# Altium PCB BatteryIot -V2.PcbDoc (part 2 of 2)
Units mm, origin at the board's own origin, x right, y up, seen from the top; angles counter-clockwise.
Board outline 114 x 84 mm, 2 copper layers (Top Layer, Bottom Layer); 153 components, 93 nets, 528 pads, 132 vias.
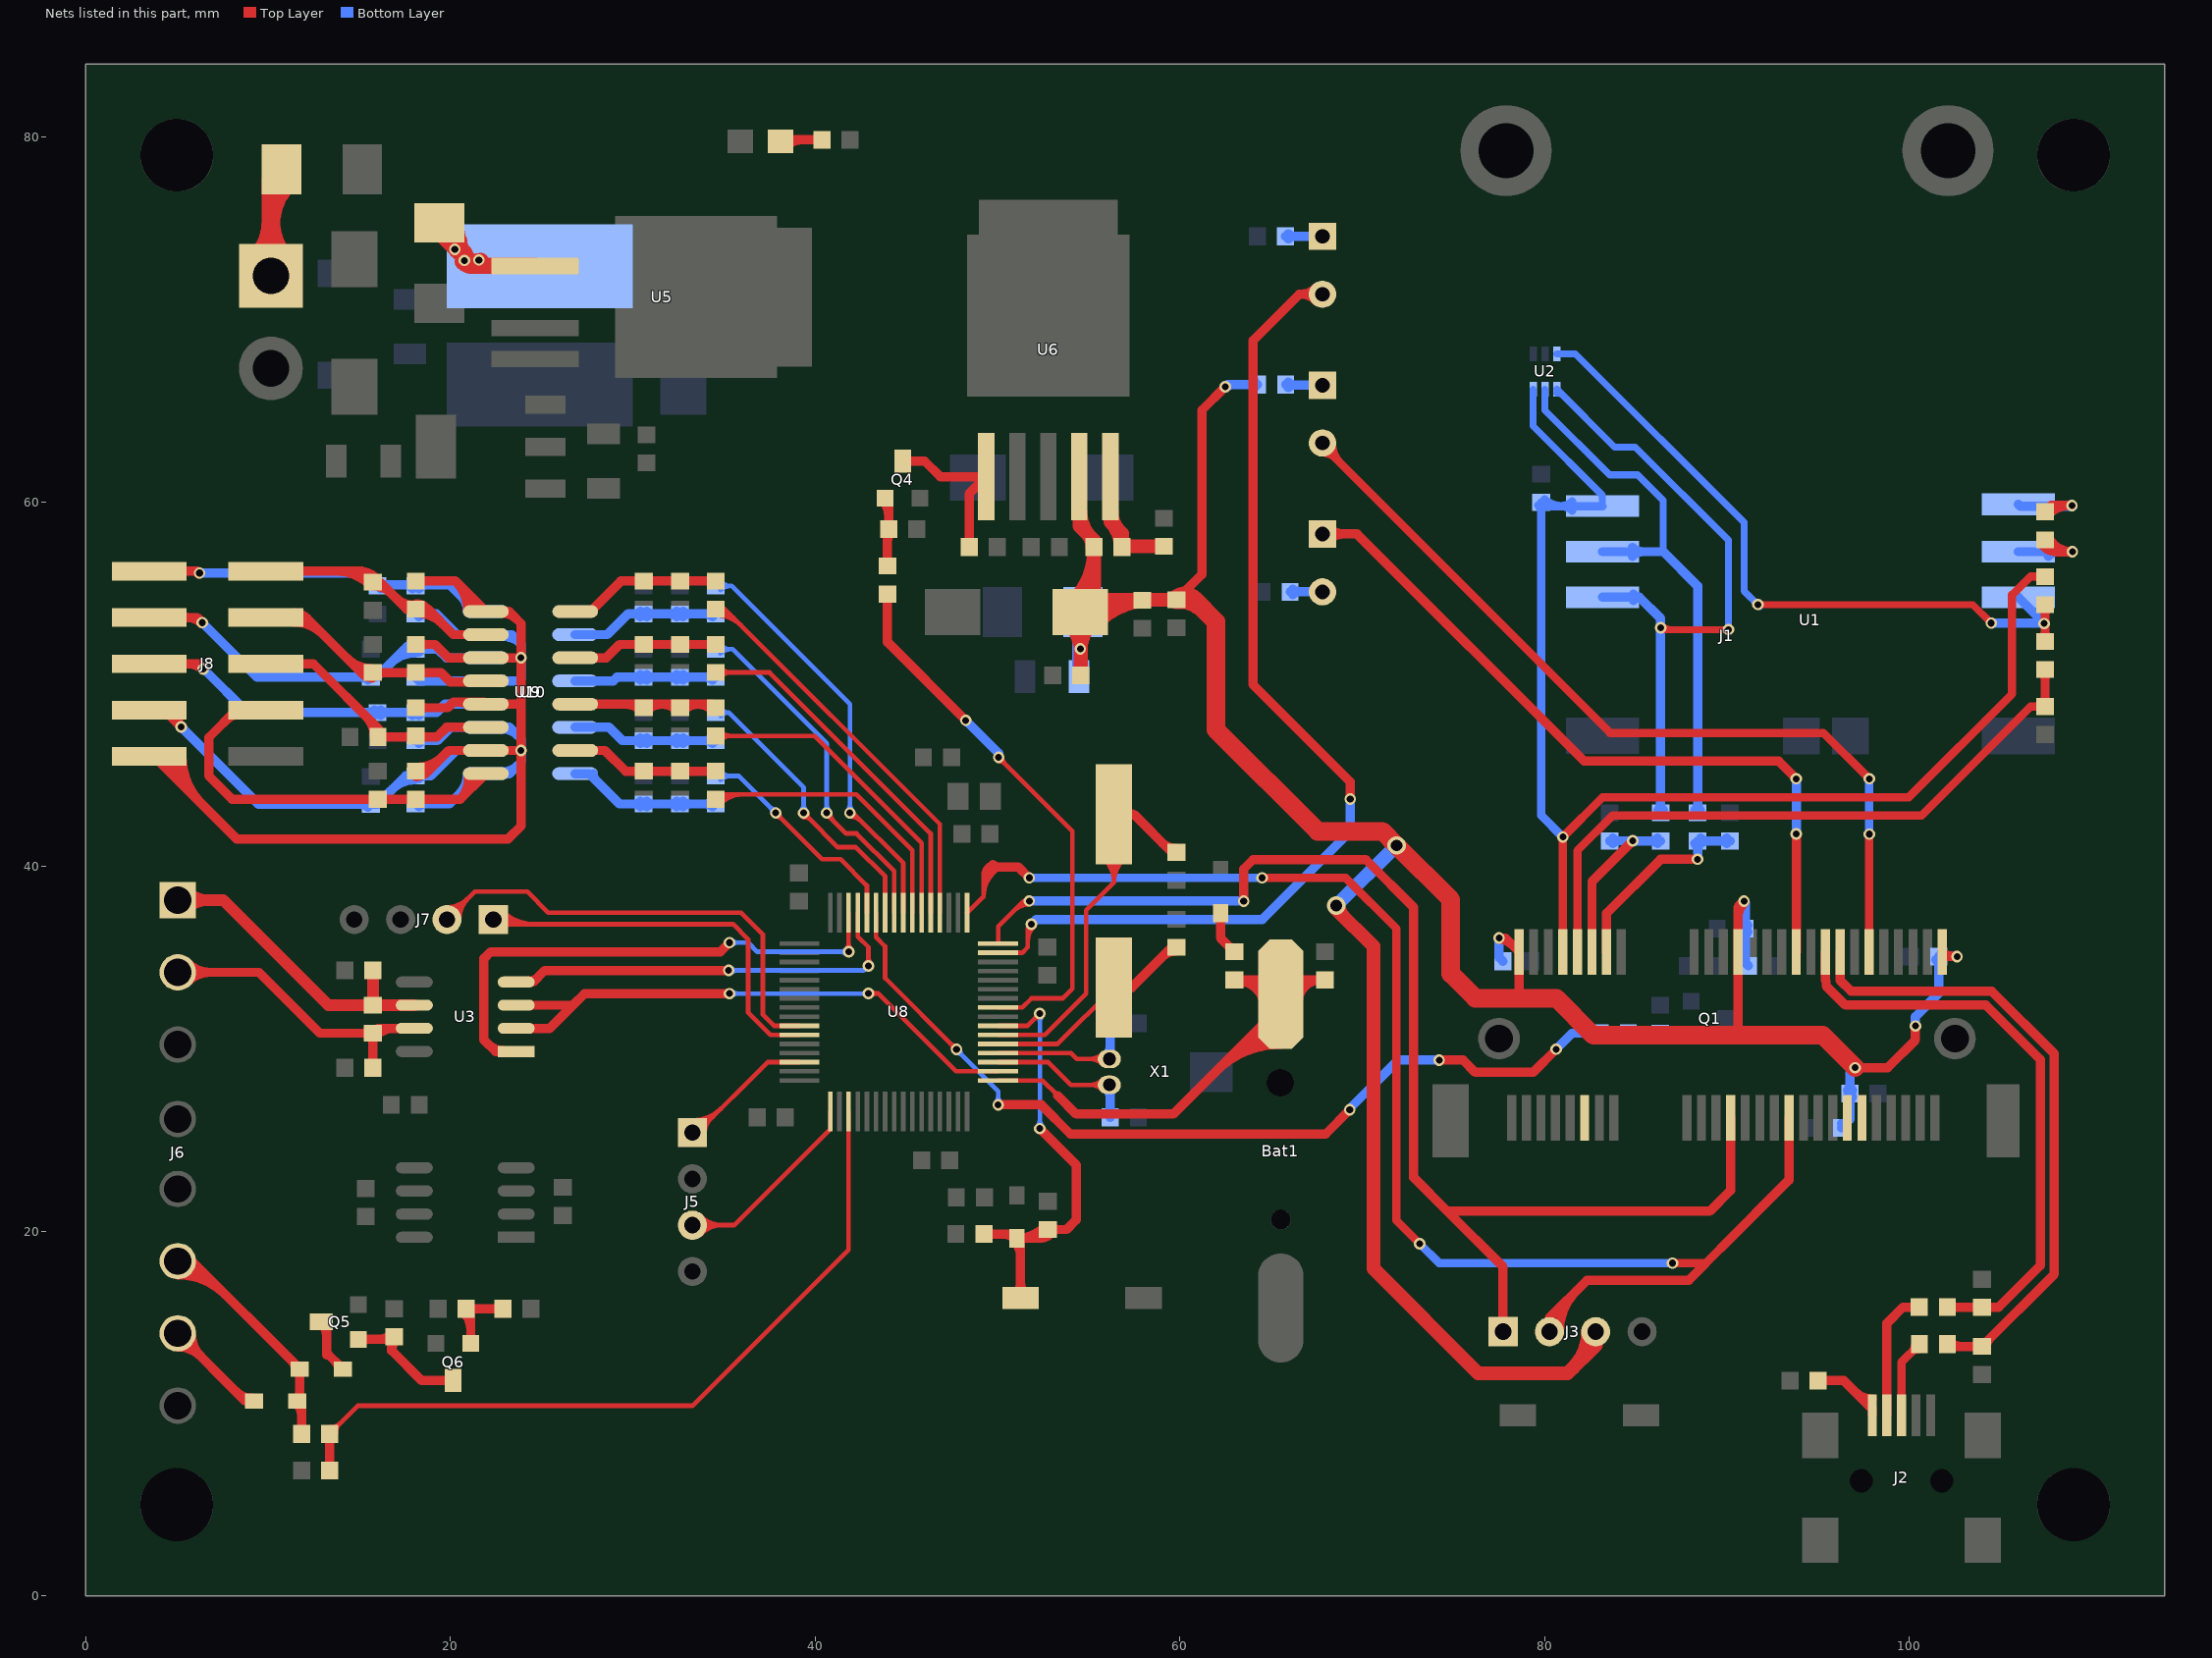
[diagram p2: the nets of this part, all layers, seen from the top]

## Via types
v1: diameter 0.635, hole 0.381, Top Layer to Bottom Layer, 96 vias
v2: diameter 1.016, hole 0.635, Top Layer to Bottom Layer, 31 vias
v3: diameter 0.889, hole 0.508, Top Layer to Bottom Layer, 5 vias

## Nets (pads, with @x,y where several pads share a name; then routed paths per layer and width w, separated by ;. In a path a pad name is that pad's centre, name@x,y a point inside that pad or via, vN(x,y) a via of type N, cw(c..) or ccw(c..) an arc to the next point about the centre after c; other vN are vias at no path point) (continued)
GND_OUT: C42.1 C44.1 C46.1 C48.1 C50.1 C52.1 C54.1 C56.1 J8.10 U9.9 U9.11 U9.13 U9.15 U10.9 U10.11 U10.13 U10.15 | length 110.7
  Top Layer w0.508: J8.10@3.493,46.025 3.759,46.025 8.28,41.504 23.165,41.504 23.876,42.215 v1(23.876,46.355) ; J8.10@3.765,46.025 ccw(c3.777,46.025) J8.10@3.768,46.016 ; J8.10@4.273,46.025 ccw(c5.512,46.025) 4.635,45.149 ; J8.10@4.781,46.025 ccw(c7.246,46.025) 5.503,44.281 ; J8.10@5.289,46.025 ccw(c8.981,46.025) 6.37,43.414 ; C42.1@18.108,45.22 18.779,45.22 19.914,46.355 U9.15@21.948,46.355 v1(23.876,46.355) ; C44.1@18.108,48.694 19.85,48.694 20.153,48.997 21.846,48.997 U9.13@21.948,48.895 23.876,48.895 ; C46.1@18.108,52.168 19.155,52.168 19.888,51.435 U9.11@21.948,51.435 v1(23.876,51.435) ; C48.1@18.108,55.642 20.281,55.642 ; C42.1@18.133,44.923 ccw(c18.133,45.765) 18.728,45.17 ; C42.1@18.133,45.431 ccw(c18.133,47.5) 19.595,46.037 ; C42.1@18.282,45.071 cw(c18.642,44.711) 18.642,45.22 cw(c18.642,45.729) C42.1@18.282,45.369 ; C44.1@18.282,48.545 cw(c18.642,48.185) 18.642,48.694 cw(c18.642,49.203) C44.1@18.282,48.843 ; C46.1@18.282,52.019 cw(c18.642,51.659) 18.642,52.168 cw(c18.642,52.677) C46.1@18.282,52.317 ; C48.1@18.282,55.493 cw(c18.642,55.133) 18.642,55.642 cw(c18.642,56.151) C48.1@18.282,55.791 ; 20.571,48.997 cw(c20.571,48.418) U9.13@20.98,48.827 ; U9.9@20.952,53.977 ccw(c18.66,54.021) 20.281,55.642 ; 21.125,54.798 cw(c20.316,53.989) U9.9@21.46,53.967 ; U9.9@22.848,53.879 cw(c22.848,52.759) 23.64,53.551 ; 20.281,55.642 U9.9@21.948,53.975 23.216,53.975 23.876,53.315 v1(23.876,51.435) ; v1(23.876,46.355) 23.927,46.355 23.876,46.406 23.876,48.895 ; 23.876,48.895 v1(23.876,51.435)
  Bottom Layer w0.508: C56.1@18.094,43.418 19.948,43.418 21.615,45.085 U10.9@21.934,45.085 23.241,45.085 23.876,45.72 v1(23.876,46.355) 23.876,46.99 23.241,47.625 U10.11@21.934,47.625 20.015,47.625 19.282,46.892 C54.1@18.094,46.892 ; C52.1@18.094,50.366 18.295,50.165 U10.13@21.934,50.165 23.749,50.165 23.876,50.292 v1(23.876,51.435) 23.876,52.197 23.368,52.705 U10.15@21.934,52.705 20.371,52.705 19.236,53.84 C50.1@18.094,53.84 ; C56.1@18.268,43.269 cw(c18.628,42.909) 18.628,43.418 cw(c18.628,43.927) C56.1@18.268,43.567 ; C54.1@18.268,46.743 cw(c18.628,46.383) 18.628,46.892 cw(c18.628,47.401) C54.1@18.268,47.041 ; C52.1@18.268,50.515 ccw(c19.114,51.361) 19.114,50.165 ; C50.1@18.268,53.691 cw(c18.628,53.331) 18.628,53.84 cw(c18.628,54.349) C50.1@18.268,53.989 ; 20.459,43.929 ccw(c19.303,45.085) U10.9@20.938,45.085 ; U10.9@21.326,44.796 ccw(c21.037,45.085) U10.9@21.446,45.085 ; U10.9@22.834,45.181 ccw(c22.834,46.395) 23.693,45.537 ; U10.11@22.834,47.529 cw(c22.834,46.315) 23.693,47.173 ; U10.15@22.837,52.609 cw(c22.88,51.201) 23.876,52.197
LED_WWAN: J1.42 LED1.2 | length 49.2
  Top Layer w0.457: LED1.2@67.818,62.693 cw(c67.818,61.725) 68.502,62.409 ; LED1.2@67.818,63.214 67.818,63.094 83.591,47.32 95.283,47.32 v1(97.8,44.803) ; LED1.2@68.339,63.214 ccw(c69.889,63.214) 68.793,62.118 ; J1.42@97.8,35.302 v1(97.8,41.765)
  Bottom Layer w0.457: v1(97.8,41.765) v1(97.8,44.803)
NetC41_1: C41.1 R40.1 R41.2 U9.2 | length 12.2
  Top Layer w0.508: U9.2@26.848,46.355 28.473,46.355 29.608,45.22 R41.2@34.558,45.22 ; C41.1@30.433,45.071 ccw(c30.073,44.711) 30.073,45.22 ccw(c30.073,45.729) C41.1@30.433,45.369 ; C41.1@30.781,45.071 cw(c31.142,44.711) 31.142,45.22 cw(c31.142,45.729) C41.1@30.781,45.369 ; R40.1@32.43,45.071 ccw(c32.069,44.711) 32.069,45.22 ccw(c32.069,45.729) R40.1@32.43,45.369 ; R40.1@32.778,45.071 cw(c33.138,44.711) 33.138,45.22 cw(c33.138,45.729) R40.1@32.778,45.369 ; R41.2@34.384,45.071 ccw(c34.023,44.711) 34.023,45.22 ccw(c34.023,45.729) R41.2@34.384,45.369
NetC43_1: C43.1 R43.1 R44.2 U9.4 | length 12.5
  Top Layer w0.508: U9.4@26.848,48.895 34.357,48.895 R44.2@34.558,48.694 ; 29.588,48.895 cw(c29.588,47.699) C43.1@30.433,48.545 ; C43.1@30.781,48.545 cw(c31.627,47.699) 31.627,48.895 ; 31.584,48.895 cw(c31.584,47.699) R43.1@32.43,48.545 ; R43.1@32.778,48.545 cw(c33.623,47.699) 33.623,48.895 ; 33.538,48.895 cw(c33.538,47.699) R44.2@34.384,48.545
NetC45_1: C45.1 R46.1 R47.2 U9.6 | length 12
  Top Layer w0.508: U9.6@26.848,51.435 28.55,51.435 29.283,52.168 R47.2@34.558,52.168 ; C45.1@30.433,52.019 ccw(c30.073,51.659) 30.073,52.168 ccw(c30.073,52.677) C45.1@30.433,52.317 ; C45.1@30.781,52.019 cw(c31.142,51.659) 31.142,52.168 cw(c31.142,52.677) C45.1@30.781,52.317 ; R46.1@32.43,52.019 ccw(c32.069,51.659) 32.069,52.168 ccw(c32.069,52.677) R46.1@32.43,52.317 ; R46.1@32.778,52.019 cw(c33.138,51.659) 33.138,52.168 cw(c33.138,52.677) R46.1@32.778,52.317 ; R47.2@34.384,52.019 ccw(c34.023,51.659) 34.023,52.168 ccw(c34.023,52.677) R47.2@34.384,52.317
NetC47_1: C47.1 R49.1 R50.2 U9.8 | length 12.4
  Top Layer w0.508: U9.8@26.848,53.975 27.686,53.975 29.353,55.642 R50.2@34.558,55.642 ; C47.1@30.433,55.493 ccw(c30.073,55.133) 30.073,55.642 ccw(c30.073,56.151) C47.1@30.433,55.791 ; C47.1@30.781,55.493 cw(c31.142,55.133) 31.142,55.642 cw(c31.142,56.151) C47.1@30.781,55.791 ; R49.1@32.43,55.493 ccw(c32.069,55.133) 32.069,55.642 ccw(c32.069,56.151) R49.1@32.43,55.791 ; R49.1@32.778,55.493 cw(c33.138,55.133) 33.138,55.642 cw(c33.138,56.151) R49.1@32.778,55.791 ; R50.2@34.384,55.493 ccw(c34.023,55.133) 34.023,55.642 ccw(c34.023,56.151) R50.2@34.384,55.791
NetC49_1: C49.1 R52.1 R53.2 U10.2 | length 12.2
  Bottom Layer w0.508: U10.2@26.834,52.705 28.6,52.705 29.735,53.84 R53.2@34.544,53.84 ; C49.1@30.419,53.691 ccw(c30.059,53.331) 30.059,53.84 ccw(c30.059,54.349) C49.1@30.419,53.989 ; C49.1@30.768,53.691 cw(c31.128,53.331) 31.128,53.84 cw(c31.128,54.349) C49.1@30.768,53.989 ; R52.1@32.416,53.691 ccw(c32.056,53.331) 32.056,53.84 ccw(c32.056,54.349) R52.1@32.416,53.989 ; R52.1@32.764,53.691 cw(c33.124,53.331) 33.124,53.84 cw(c33.124,54.349) R52.1@32.764,53.989 ; R53.2@34.37,53.691 ccw(c34.01,53.331) 34.01,53.84 ccw(c34.01,54.349) R53.2@34.37,53.989
NetC51_1: C51.1 R55.1 R56.2 U10.4 | length 11.8
  Bottom Layer w0.508: U10.4@26.834,50.165 28.933,50.165 29.134,50.366 R56.2@34.544,50.366 ; C51.1@30.419,50.217 ccw(c30.059,49.857) 30.059,50.366 ccw(c30.059,50.875) C51.1@30.419,50.515 ; C51.1@30.768,50.217 cw(c31.128,49.857) 31.128,50.366 cw(c31.128,50.875) C51.1@30.768,50.515 ; R55.1@32.416,50.217 ccw(c32.056,49.857) 32.056,50.366 ccw(c32.056,50.875) R55.1@32.416,50.515 ; R55.1@32.764,50.217 cw(c33.124,49.857) 33.124,50.366 cw(c33.124,50.875) R55.1@32.764,50.515 ; R56.2@34.37,50.217 ccw(c34.01,49.857) 34.01,50.366 ccw(c34.01,50.875) R56.2@34.37,50.515
NetC53_1: C53.1 R58.1 R59.2 U10.6 | length 12
  Bottom Layer w0.508: U10.6@26.834,47.625 28.702,47.625 29.435,46.892 R59.2@34.544,46.892 ; C53.1@30.419,46.743 ccw(c30.059,46.383) 30.059,46.892 ccw(c30.059,47.401) C53.1@30.419,47.041 ; C53.1@30.768,46.743 cw(c31.128,46.383) 31.128,46.892 cw(c31.128,47.401) C53.1@30.768,47.041 ; R58.1@32.416,46.743 ccw(c32.056,46.383) 32.056,46.892 ccw(c32.056,47.401) R58.1@32.416,47.041 ; R58.1@32.764,46.743 cw(c33.124,46.383) 33.124,46.892 cw(c33.124,47.401) R58.1@32.764,47.041 ; R59.2@34.37,46.743 ccw(c34.01,46.383) 34.01,46.892 ccw(c34.01,47.401) R59.2@34.37,47.041
NetC55_1: C55.1 R61.1 R62.2 U10.8 | length 12.8
  Bottom Layer w0.508: U10.8@26.834,45.085 27.61,45.085 29.277,43.418 R62.2@34.544,43.418 ; U10.8@27.83,45.085 ccw(c28.362,45.085) 27.986,44.709 ; C55.1@30.419,43.269 ccw(c30.059,42.909) 30.059,43.418 ccw(c30.059,43.927) C55.1@30.419,43.567 ; C55.1@30.768,43.269 cw(c31.128,42.909) 31.128,43.418 cw(c31.128,43.927) C55.1@30.768,43.567 ; R61.1@32.416,43.269 ccw(c32.056,42.909) 32.056,43.418 ccw(c32.056,43.927) R61.1@32.416,43.567 ; R61.1@32.764,43.269 cw(c33.124,42.909) 33.124,43.418 cw(c33.124,43.927) R61.1@32.764,43.567 ; R62.2@34.37,43.269 ccw(c34.01,42.909) 34.01,43.418 ccw(c34.01,43.927) R62.2@34.37,43.567
NetD1_1: D1.1 J4.1 | length 13.4
  Top Layer w1.016: J4.1@9.282,73.268 ccw(c7.162,75.388) 10.16,75.388 ccw(c13.158,75.388) J4.1@11.038,73.268 ; J4.1@10.16,72.39 10.16,77.648 D1.1@10.744,78.232 ; 10.16,75.15 cw(c13.534,75.15) D1.1@11.148,77.536
NetD2_2: D2.2 L1.1 U5.2 | length 13
  Top Layer w0.889: D2.2@19.558,74.6 21.235,72.923 ; v1@20.271,73.962 cw(c20.086,73.12) 20.812,73.584 ; D2.2@20.332,75.256 ccw(c23.422,75.111) 21.235,72.923 ; v1@20.346,73.763 ccw(c19.76,74.193) D2.2@20.478,74.303 ; v1@20.654,73.504 ccw(c21.565,74.414) v1@21.565,73.127 ; v1@21.475,73.164 ccw(c22.055,73.744) 22.055,72.923 ; v1@21.678,73.196 cw(c21.235,73.42) 21.235,72.923 ; U5.2@24.638,72.923 21.235,72.923 ; v1@20.687,73.138 ccw(c21.206,73.657) 21.206,72.923 cw(c21.206,73.657) v1@20.687,73.138
  other v1: 20.777,73.228 21.565,73.254 20.244,73.838
NetD7_2: D7.2 R34.1 | length 3.2
  Top Layer w0.508: D7.2@62.23,37.428 62.23,36.076 R34.1@62.992,35.314 ; R34.1@62.589,35.717 cw(c62.186,35.314) R34.1@62.756,35.314 ; R34.1@62.649,35.657 ccw(c62.967,35.974) R34.1@62.967,35.525
NetD9_1: D9.1 Q5.3 | length 4.3
  Top Layer w0.508: Q5.3@12.925,15.021 13.208,14.738 13.208,13.208 13.329,13.208 D9.1@14.105,12.432 ; Q5.3@12.959,14.878 cw(c12.359,14.277) 13.208,14.277 ; 13.685,12.852 cw(c13.265,12.432) D9.1@13.859,12.432
NetD9_2: D9.2 D10.2 J6.6 R37.1 | length 20
  Top Layer w0.508: J6.6@5.055,17.6 cw(c5.055,13.924) 7.654,16.523 ; J6.6@5.055,18.108 cw(c5.055,15.659) 6.787,17.391 ; J6.6@5.055,18.346 5.831,18.346 D9.2@11.745,12.432 ; 11.325,12.852 cw(c10.905,12.432) D9.2@11.499,12.432 ; D10.2@11.565,10.554 cw(c10.904,9.893) 11.839,9.893 ; D10.2@11.565,10.782 ccw(c11.131,11.216) 11.745,11.216 ; R37.1@11.69,9.05 ccw(c11.33,9.41) 11.839,9.41 ccw(c12.349,9.41) R37.1@11.988,9.05 ; D9.2@11.715,12.401 11.745,12.371 11.745,10.654 11.839,10.56 R37.1@11.839,8.876
NetD10_1: D10.1 J6.7 | length 9.6
  Top Layer w0.508: J6.7@5.055,13.64 cw(c5.055,11.839) 6.328,13.112 cw(c7.602,14.386) J6.7@5.801,14.386 ; J6.7@5.055,14.386 8.773,10.668 D10.1@9.234,10.668 ; 8.232,11.209 ccw(c9.149,12.126) D10.1@9.149,10.829
NetJ1_32: J1.32 LED4.1 | length 42.9
  Top Layer w0.508: LED4.1@67.818,58.23 69.71,58.23 82.169,45.771 92.833,45.771 v1(93.8,44.803) ; LED4.1@68.169,57.879 cw(c69.015,57.032) 69.015,58.23 cw(c69.015,59.427) LED4.1@68.169,58.58 ; J1.32@93.8,35.302 v1(93.8,41.781)
  Bottom Layer w0.508: v1(93.8,41.781) v1(93.8,44.803)
NetJ2_2: J2.2 R16.1 | length 8
  Top Layer w0.508: J2.2@98.768,9.899 98.768,14.942 99.65,15.824 R16.1@100.541,15.824 ; R16.1@100.392,15.675 ccw(c100.032,15.315) 100.032,15.824 ccw(c100.032,16.333) R16.1@100.392,15.973
NetJ2_3: J2.3 R14.1 | length 5.2
  Top Layer w0.457: J2.3@99.568,9.899 99.568,12.811 R14.1@100.549,13.792 ; R14.1@100.103,13.346 cw(c100.549,12.9) R14.1@100.549,13.531 ; R14.1@100.163,13.406 ccw(c99.802,13.767) R14.1@100.313,13.767
NetLED1_1: LED1.1 R17.2 | length 2.8
  Bottom Layer w0.508: R17.2@65.802,66.421 65.834,66.389 LED1.1@67.818,66.389 ; R17.2@65.951,66.247 cw(c66.295,65.903) 66.295,66.389 ; R17.2@65.951,66.545 ccw(c66.328,66.922) 66.328,66.389
NetLED2_1: LED2.1 R22.1 | length 4.6
  Top Layer w0.508: LED2.1@38.099,79.758 38.187,79.846 R22.1@40.378,79.846 ; LED2.1@38.434,79.488 cw(c39.296,78.626) 39.296,79.846 ; LED2.1@38.434,80.027 ccw(c38.872,80.465) 38.872,79.846 ; R22.1@40.229,79.696 ccw(c39.869,79.336) 39.869,79.846 ccw(c39.869,80.355) R22.1@40.229,79.995
NetLED3_1: LED3.1 R32.2 | length 2.8
  Bottom Layer w0.508: R32.2@65.794,74.549 LED3.1@67.818,74.549 ; R32.2@65.943,74.4 cw(c66.303,74.04) 66.303,74.549 cw(c66.303,75.058) R32.2@65.943,74.698
NetLED4_2: LED4.2 R13.2 | length 2.6
  Bottom Layer w0.508: R13.2@66.048,55.054 LED4.2@67.818,55.054 ; R13.2@66.197,54.905 cw(c66.557,54.545) 66.557,55.054 cw(c66.557,55.564) R13.2@66.197,55.204
NetQ1_1: Q1.1 R4.2 R5.1 | length 4.3
  Bottom Layer w0.508: R4.2@84.59,30.849 84.744,30.695 Q1.1@88.048,30.695 ; Q1.1@87.904,30.551 ccw(c87.557,30.204) 87.557,30.695 ccw(c87.557,31.185) Q1.1@87.904,30.838
NetQ4_1: Q4.1 R27.1 R28.2 | length 6.9
  Top Layer w0.508: Q4.1@43.694,60.05 cw(c42.876,59.232) 44.033,59.232 ; R27.1@43.818,56.621 ccw(c43.458,56.982) 43.967,56.982 ccw(c44.477,56.982) R27.1@44.117,56.621 ; Q4.1@43.838,60.193 cw(c43.838,59.998) 44.033,59.998 R28.2@44.033,58.485 43.967,58.42 R27.1@43.967,56.472 ; R28.2@43.884,58.66 ccw(c43.523,59.02) 44.033,59.02 ccw(c44.542,59.02) R28.2@44.182,58.66 ; 43.967,57.793 cw(c44.7,57.793) R28.2@44.182,58.311
NetQ4_3: Q4.3 R23.1 U6.1 | length 12.2
  Top Layer w0.508: Q4.3@44.803,62.225 46.004,62.225 46.862,61.367 U6.1@49.384,61.367 48.447,60.43 R23.1@48.447,57.506 ; Q4.3@44.947,62.082 cw(c45.293,61.735) 45.293,62.225 cw(c45.293,62.716) Q4.3@44.947,62.369 ; R23.1@48.298,57.68 ccw(c47.938,58.04) 48.447,58.04 ccw(c48.957,58.04) R23.1@48.596,57.68 ; U6.1@49.188,61.367 cw(c48.715,61.367) 49.05,61.033 cw(c49.384,60.698) U6.1@49.384,61.171 ; U6.1@49.246,61.229 ccw(c48.911,60.894) 48.911,61.367 ccw(c48.911,61.841) U6.1@49.246,61.506
NetQ5_1: Q5.1 Q6.3 R29.2 | length 9.5
  Top Layer w0.508: Q5.1@14.957,14.056 16.781,14.056 16.781,13.445 18.429,11.797 Q6.3@20.153,11.797 ; Q5.1@15.101,13.912 cw(c15.448,13.565) 15.448,14.056 cw(c15.448,14.547) Q5.1@15.101,14.2 ; 16.04,14.056 ccw(c16.04,15.064) R29.2@16.753,14.351 ; 16.781,13.435 cw(c17.621,13.435) R29.2@17.047,14.048 ; Q6.3@20.009,11.653 ccw(c19.662,11.306) 19.662,11.797 ccw(c19.662,12.288) Q6.3@20.009,11.941
NetQ6_1: Q6.1 R30.1 R31.2 | length 7.5
  Top Layer w0.508: R31.2@20.715,15.56 cw(c19.742,14.586) 21.118,14.586 ; Q6.1@20.974,13.973 ccw(c20.628,14.32) 21.118,14.32 ccw(c21.609,14.32) Q6.1@21.262,13.973 ; R31.2@21.013,15.585 cw(c21.374,15.225) 21.374,15.734 cw(c21.374,16.243) R31.2@21.013,15.883 ; Q6.1@21.118,13.829 21.118,15.48 R31.2@20.864,15.734 R30.1@22.88,15.734 ; R30.1@22.731,15.585 ccw(c22.371,15.225) 22.371,15.734 ccw(c22.371,16.243) R30.1@22.731,15.883
NetR2_2: R2.2 R3.1 U1.6 U2.3 | length 41.1
  Top Layer w0.381: v1(91.694,54.356) 103.476,54.356 v1(104.492,53.34) v1@104.517,53.315
  Top Layer w0.508: R3.1@107.293,52.481 ccw(c106.933,52.841) 107.442,52.841 ccw(c107.951,52.841) R3.1@107.591,52.481 ; R2.2@107.293,54.199 cw(c106.933,53.839) 107.442,53.839 cw(c107.951,53.839) R2.2@107.591,54.199 ; R3.1@107.442,52.332 R2.2@107.442,54.348
  Bottom Layer w0.381: U2.3@80.672,68.106 81.69,68.106 90.932,58.864 90.932,55.11 v1@91.8,54.242 ; 91.464,54.578 ccw(c91.694,54.809) v1@91.694,54.483
  Bottom Layer w0.508: v1(104.492,53.34) 107.366,53.34 v1(107.391,53.315) 107.391,53.337 U1.6@105.974,54.754
NetR6_1: R6.1 U1.2 U2.5 | length 33.1
  Bottom Layer w0.381: U2.5@80.022,66.166 80.022,65.012 83.566,61.468 85.11,61.468 86.51,60.068 86.51,57.254
  Bottom Layer w0.508: U1.2@83.174,57.254 86.51,57.254 88.392,55.372 R6.1@88.392,42.934 ; U1.2@84.819,57.009 cw(c85.409,56.419) 85.409,57.254 cw(c85.409,58.089) U1.2@84.819,57.499 ; R6.1@88.243,43.083 ccw(c87.883,43.443) 88.392,43.443 ccw(c88.901,43.443) R6.1@88.541,43.083
NetR7_1: R7.1 U1.3 U2.4 | length 38.3
  Top Layer w0.381: v1(86.36,53.086) 86.462,52.984 v1(90.08,52.984) ; v1@86.45,53.176 ccw(c86.912,53.638) 86.912,52.984
  Bottom Layer w0.381: U2.4@80.672,65.957 cw(c80.672,65.451) 81.029,65.808 ; U2.4@80.672,66.166 83.846,62.992 84.974,62.992 90.08,57.886 v1(90.08,52.984)
  Bottom Layer w0.508: U1.3@83.174,54.754 85.2,54.754 ; U1.3@84.867,54.57 cw(c85.2,54.361) 85.2,54.754 ; U1.3@84.867,54.938 ccw(c85.2,55.147) 85.2,54.754 ; R7.1@86.211,43.083 ccw(c85.851,43.443) 86.36,43.443 ccw(c86.869,43.443) R7.1@86.509,43.083 ; R7.1@86.36,42.934 v1(86.36,53.086) 86.36,53.594 85.2,54.754
NetR8_1: R8.1 U1.5 | length 9.5
  Top Layer w0.508: R8.1@107.208,57.759 ccw(c108.074,58.244) 108.074,57.252 ; R8.1@107.442,57.904 108.094,57.252 v1(108.941,57.252) cw(c108.941,58.73) R8.1@107.651,58.007 ; R8.1@107.467,57.693 cw(c107.467,57.244) R8.1@107.785,57.561 ; R8.1@107.678,57.904 ccw(c108.248,57.904) R8.1@107.845,57.501
  Bottom Layer w0.508: U1.5@105.974,57.254 v1@108.966,57.254 ; U1.5@107.619,57.009 cw(c108.209,56.419) 108.209,57.254 cw(c108.209,58.089) U1.5@107.619,57.499
NetR8_2: R8.2 U1.4 | length 6
  Top Layer w0.508: R8.2@107.442,59.444 107.79,59.792 v1(108.915,59.792) ; R8.2@107.616,59.295 cw(c108.816,58.095) v1@108.816,59.792
  Bottom Layer w0.508: U1.4@105.974,59.854 106.074,59.754 v1@108.966,59.754
NetR24_1: R24.1 R26.2 U6.5 | length 9.1
  Top Layer w0.762: U6.5@56.191,61.367 56.191,58.896 ; U6.5@56.26,59.417 ccw(c57.686,59.417) 56.678,58.41 ; R24.1@56.744,57.532 ccw(c54.857,57.562) 56.191,58.896 ; R26.2@59.131,57.548 56.871,57.548 R24.1@56.828,57.506 56.828,58.26 56.191,58.896
NRST: Bt1.2 C33.1 D8.1 R35.2 U8.7 | length 33.6
  Top Layer w0.254: U8.7@50.038,31.258 51.654,31.258 v1(52.324,31.928) v1@52.407,32.011 ; v1@52.134,31.928 cw(c51.674,31.928) 51.999,31.603 cw(c52.324,31.278) v1@52.324,31.738
  Top Layer w0.508: C33.1@49.259,19.837 50.814,19.837 D8.1@51.054,19.597 ; C33.1@49.408,19.688 cw(c49.768,19.328) 49.768,19.837 cw(c49.768,20.347) C33.1@49.408,19.987 ; 50.291,19.837 cw(c50.291,18.919) D8.1@50.94,19.568 ; D8.1@50.94,19.398 cw(c50.167,18.625) 51.26,18.625 ; Bt1.2@51.016,16.577 ccw(c50.425,17.168) 51.26,17.168 ccw(c52.096,17.168) Bt1.2@51.505,16.577 ; Bt1.2@51.26,16.332 51.26,19.391 D8.1@51.054,19.597 ; 52.276,19.597 ccw(c52.276,20.536) R35.2@52.941,19.874 ; v1(52.324,25.619) 54.312,23.631 54.312,20.606 53.789,20.083 R35.2@52.756,20.083 52.27,19.597 D8.1@51.054,19.597 ; R35.2@52.353,19.681 ccw(c51.95,20.083) R35.2@52.52,20.083 ; R35.2@52.413,19.741 cw(c52.731,19.423) R35.2@52.731,19.872 ; R35.2@52.581,20.232 cw(c51.054,21.751) D8.1@51.054,19.597 ; R35.2@52.93,19.934 cw(c53.29,19.574) 53.29,20.083 cw(c53.29,20.593) R35.2@52.93,20.233
  Bottom Layer w0.254: v1@52.189,25.754 ccw(c51.864,26.079) 52.324,26.079 ccw(c52.784,26.079) v1@52.459,25.754 ; v1@52.189,31.794 cw(c51.864,31.468) 52.324,31.468 cw(c52.784,31.468) v1@52.459,31.794 ; v1(52.324,25.619) v1(52.324,31.928)
O1: C42.2 J8.2 R39.1 U9.16 | length 28.4
  Top Layer w0.508: 7.757,48.067 cw(c8.341,47.484) J8.2@8.341,48.309 ; J8.2@9.881,48.565 8.255,48.565 6.756,47.066 6.756,44.958 8.034,43.68 R39.1@16.016,43.68 C42.2@18.108,43.68 20.543,43.68 ; R39.1@15.842,43.531 ccw(c15.481,43.171) 15.481,43.68 ccw(c15.481,44.189) R39.1@15.842,43.829 ; R39.1@16.19,43.531 cw(c16.55,43.171) 16.55,43.68 cw(c16.55,44.189) R39.1@16.19,43.829 ; C42.2@17.934,43.531 ccw(c17.573,43.171) 17.573,43.68 ccw(c17.573,44.189) C42.2@17.934,43.829 ; C42.2@18.282,43.531 cw(c18.642,43.171) 18.642,43.68 cw(c18.642,44.189) C42.2@18.282,43.829 ; U9.16@20.954,45.065 cw(c19.471,44.752) 20.543,43.68 ; 21.205,44.342 ccw(c20.565,44.983) U9.16@21.451,45.17 ; U9.16@21.948,45.085 20.543,43.68
O2: C44.2 J8.3 R42.1 U9.14 | length 18.4
  Top Layer w0.508: J8.3@9.881,51.105 12.497,51.105 16.035,47.566 R42.1@16.035,47.092 19.262,47.092 19.795,47.625 U9.14@21.948,47.625 ; J8.3@11.602,50.924 cw(c12.039,50.487) 12.039,51.105 cw(c12.039,51.723) J8.3@11.602,51.286 ; 15.357,48.244 cw(c14.23,47.117) R42.1@15.824,47.117 ; R42.1@16.185,46.942 cw(c16.545,46.582) 16.545,47.092 cw(c16.545,47.601) R42.1@16.185,47.241 ; 17.423,47.092 ccw(c17.423,47.814) C44.2@17.934,47.303 ; C44.2@18.282,47.303 ccw(c18.793,47.814) 18.793,47.092
O3: C46.2 J8.4 R45.1 U9.12 | length 22.8
  Top Layer w0.508: J8.4@9.881,53.645 12.09,53.645 15.107,50.628 16.016,50.628 C46.2@18.108,50.628 19.476,50.628 19.99,50.114 21.897,50.114 U9.12@21.948,50.165 ; J8.4@11.421,53.389 cw(c11.421,51.154) 13.001,52.734 ; J8.4@11.421,53.897 cw(c11.421,52.888) 12.134,53.601 ; J8.4@11.602,53.464 cw(c12.039,53.027) 12.039,53.645 cw(c12.039,54.263) J8.4@11.602,53.826 ; 14.312,51.424 ccw(c15.723,52.835) R45.1@15.723,50.839 ; 15.179,50.556 ccw(c15.723,51.101) R45.1@15.723,50.331 ; R45.1@15.574,50.479 ccw(c15.214,50.119) 15.214,50.628 ccw(c15.214,51.137) R45.1@15.574,50.777 ; R45.1@15.922,50.479 cw(c16.282,50.119) 16.282,50.628 cw(c16.282,51.137) R45.1@15.922,50.777 ; C46.2@17.934,50.479 ccw(c17.573,50.119) 17.573,50.628 ccw(c17.573,51.137) C46.2@17.934,50.777 ; C46.2@18.282,50.479 cw(c18.642,50.119) 18.642,50.628 cw(c18.642,51.137) C46.2@18.282,50.777 ; 20.693,50.114 ccw(c20.693,50.519) U9.12@20.98,50.233
O4: C48.2 J8.5 R48.1 U9.10 | length 24.5
  Top Layer w0.508: J8.5@9.881,56.185 15.146,56.185 R48.1@15.748,55.583 16.134,55.583 17.615,54.102 ; J8.5@11.602,56.004 cw(c12.039,55.567) 12.039,56.185 cw(c12.039,56.803) J8.5@11.602,56.366 ; 13.761,56.185 cw(c13.761,53.621) R48.1@15.574,55.434 ; 14.988,56.185 cw(c14.988,54.848) R48.1@15.933,55.793 ; R48.1@15.345,55.986 cw(c14.942,55.583) R48.1@15.512,55.583 ; R48.1@15.405,55.926 ccw(c15.723,56.243) R48.1@15.723,55.794 ; R48.1@15.773,55.372 cw(c15.773,53.992) 16.749,54.968 ; 16.924,54.793 ccw(c18.083,55.952) C48.2@18.083,54.313 ; C48.2@17.925,53.962 ccw(c17.615,53.689) 17.615,54.102 ; C48.2@17.925,54.242 cw(c17.615,54.515) 17.615,54.102 ; C48.2@18.133,53.891 cw(c18.133,51.842) 19.582,53.291 ; C48.2@18.133,54.399 cw(c18.133,53.576) 18.715,54.158 ; C48.2@18.282,53.953 cw(c18.642,53.593) 18.642,54.102 cw(c18.642,54.611) C48.2@18.282,54.251 ; U9.10@21.948,52.705 20.168,52.705 18.771,54.102 C48.2@18.108,54.102 17.615,54.102
O5: C50.2 J8.6 R51.1 U10.16 | length 24.3
  Top Layer w0.508: J8.6@3.493,56.185 6.147,56.185 v1(6.248,56.083) ; J8.6@5.214,56.004 cw(c5.651,55.567) 5.651,56.185 cw(c5.651,56.803) J8.6@5.214,56.366 ; 5.85,56.185 cw(c5.85,55.685) v1@6.203,56.038
  Bottom Layer w0.508: v1(6.248,56.083) 15.299,56.083 R51.1@16.002,55.38 16.07,55.448 19.964,55.448 21.438,53.975 U10.16@21.934,53.975 ; R51.1@15.599,55.783 cw(c15.196,55.38) R51.1@15.766,55.38 ; R51.1@15.659,55.723 ccw(c15.977,56.04) R51.1@15.977,55.591 ; R51.1@16.176,55.231 cw(c16.701,54.706) 16.701,55.448 ; 17.395,55.448 cw(c17.395,54.706) C50.2@17.92,55.231 ; C50.2@18.268,55.231 cw(c18.793,54.706) 18.793,55.448 ; 20.585,54.828 cw(c19.732,53.975) U10.16@20.938,53.975
O6: C52.2 J8.7 R54.1 U10.14 | length 27.8
  Top Layer w0.508: J8.7@3.493,53.645 6.121,53.645 v1(6.401,53.365) ; J8.7@5.214,53.464 cw(c5.651,53.027) 5.651,53.645 cw(c5.651,54.263) J8.7@5.214,53.826 ; 5.573,53.645 cw(c5.573,52.538) v1@6.356,53.32
  Bottom Layer w0.508: v1(6.401,53.365) 9.4,50.366 R54.1@15.646,50.366 15.949,50.366 17.489,51.906 C52.2@18.094,51.906 19.316,51.906 19.787,51.435 U10.14@21.934,51.435 ; R54.1@15.472,50.217 ccw(c15.112,49.857) 15.112,50.366 ccw(c15.112,50.875) R54.1@15.472,50.515 ; R54.1@15.671,50.577 ccw(c15.671,51.757) 16.506,50.923 ; 16.719,51.136 cw(c18.069,49.785) C52.2@18.069,51.695 ; 17.586,52.003 cw(c18.069,51.52) C52.2@18.069,52.203 ; C52.2@17.92,51.757 ccw(c17.56,51.397) 17.56,51.906 ccw(c17.56,52.415) C52.2@17.92,52.055 ; C52.2@18.268,51.757 cw(c18.628,51.397) 18.628,51.906 cw(c18.628,52.415) C52.2@18.268,52.055
O7: C54.2 J8.8 R57.1 U10.12 | length 24.8
  Top Layer w0.508: J8.8@3.493,51.105 6.172,51.105 v1(6.452,50.825) ; J8.8@5.214,50.924 cw(c5.651,50.487) 5.651,51.105 cw(c5.651,51.723) J8.8@5.214,51.286 ; 5.624,51.105 cw(c5.624,49.998) v1@6.407,50.78
  Bottom Layer w0.508: v1@6.464,50.838 8.87,48.432 R57.1@16.002,48.432 19.234,48.432 19.697,48.895 U10.12@21.934,48.895 ; R57.1@15.828,48.283 ccw(c15.468,47.923) 15.468,48.432 ccw(c15.468,48.941) R57.1@15.828,48.581 ; R57.1@16.176,48.283 cw(c16.536,47.923) 16.536,48.432 cw(c16.536,48.941) R57.1@16.176,48.581 ; C54.2@17.92,48.283 ccw(c17.56,47.923) 17.56,48.432 ccw(c17.56,48.941) C54.2@17.92,48.581 ; C54.2@18.268,48.283 cw(c18.628,47.923) 18.628,48.432 cw(c18.628,48.941) C54.2@18.268,48.581
O8: C56.2 J8.9 R60.1 U10.10 | length 28.2
  Top Layer w0.508: J8.9@3.493,48.565 4.318,48.565 v1(5.232,47.65) cw(c5.609,48.027) J8.9@5.22,48.39 ; J8.9@4.848,48.737 ccw(c5.224,48.386) 4.861,48.022
  Bottom Layer w0.508: v1(5.232,47.65) 9.49,43.393 R60.1@15.646,43.393 15.986,43.393 17.551,44.958 C56.2@18.094,44.958 18.923,44.958 20.32,46.355 U10.10@21.934,46.355 ; R60.1@15.472,43.243 ccw(c15.112,42.883) 15.112,43.393 ccw(c15.112,43.902) R60.1@15.472,43.542 ; R60.1@15.671,43.604 ccw(c15.671,44.873) 16.569,43.975 ; 16.825,44.232 cw(c18.069,42.988) C56.2@18.069,44.747 ; C56.2@17.92,44.809 ccw(c17.56,44.449) 17.56,44.958 ccw(c17.56,45.467) C56.2@17.92,45.107 ; C56.2@18.268,44.809 cw(c18.628,44.449) 18.628,44.958 cw(c18.628,45.467) C56.2@18.268,45.107
OT1: R41.1 U8.23 | length 17.8
  Top Layer w0.254: R41.1@34.558,43.68 34.82,43.942 42.266,43.942 45.338,40.87 U8.23@45.338,37.458 ; R41.1@34.642,43.621 cw(c35.418,42.845) 35.418,43.942 ; R41.1@34.822,43.441 cw(c36.031,42.231) 36.031,43.942
OT2: R44.1 U8.22 | length 18.8
  Top Layer w0.254: R44.1@34.558,47.154 39.968,47.154 45.838,41.284 U8.22@45.838,37.458 ; R44.1@34.822,46.915 cw(c35.399,46.338) 35.399,47.154 cw(c35.399,47.97) R44.1@34.822,47.393
OT3: R47.1 U8.21 | length 21.1
  Top Layer w0.254: R47.1@34.558,50.628 37.51,50.628 46.338,41.8 U8.21@46.338,37.458 ; R47.1@34.822,50.389 cw(c35.399,49.812) 35.399,50.628 cw(c35.399,51.444) R47.1@34.822,50.867
OT4: R50.1 U8.20 | length 25.6
  Top Layer w0.254: R50.1@34.558,54.102 35.052,54.102 ; R50.1@34.583,53.764 cw(c34.583,51.815) 35.961,53.193 ; R50.1@34.583,54.018 cw(c34.583,52.682) 35.527,53.627 ; R50.1@34.583,54.272 cw(c34.583,53.55) 35.094,54.06 ; R50.1@34.903,53.995 cw(c35.052,53.945) 35.052,54.102 ; R50.1@34.903,54.209 ccw(c35.052,54.259) 35.052,54.102 ; U8.20@46.838,37.458 46.838,42.316 35.052,54.102
OT5: R53.1 U8.24 | length 25.3
  Top Layer w0.254: v1@41.91,42.735 cw(c41.91,41.875) 42.519,42.483 ; v1@42.076,42.926 44.838,40.164 U8.24@44.838,37.458
  Bottom Layer w0.254: R53.1@34.544,55.38 35.425,55.38 41.91,48.895 v1(41.91,42.926) ; R53.1@34.808,55.141 cw(c35.385,54.564) 35.385,55.38 cw(c35.385,56.196) R53.1@34.808,55.619 ; v1@41.775,43.061 ccw(c41.45,43.386) 41.91,43.386 ccw(c42.37,43.386) v1@42.045,43.061
OT6: R56.1 U8.25 | length 22
  Top Layer w0.254: v1@40.64,42.735 cw(c40.64,42.459) 40.835,42.655 ; v1@40.64,42.85 41.69,41.8 42.274,41.8 44.338,39.736 U8.25@44.338,37.458 ; v1@40.831,42.926 ccw(c41.474,42.926) 41.019,42.471
  Bottom Layer w0.254: R56.1@34.544,51.906 35.47,51.906 40.64,46.736 v1(40.64,42.926) ; R56.1@34.808,51.667 cw(c35.385,51.09) 35.385,51.906 cw(c35.385,52.722) R56.1@34.808,52.145 ; v1@40.505,43.061 ccw(c40.18,43.386) 40.64,43.386 ccw(c41.1,43.386) v1@40.775,43.061
OT7: R59.1 U8.26 | length 18.6
  Top Layer w0.254: v1@39.37,42.672 39.624,42.672 ; v1@39.37,42.735 cw(c39.37,42.276) 39.695,42.601 cw(c40.02,42.926) v1@39.56,42.926 ; v1@39.406,42.739 cw(c39.452,42.5) 39.624,42.672 ; v1@39.557,42.89 ccw(c39.796,42.844) 39.624,42.672 ; U8.26@43.838,37.458 43.838,39.449 42.24,41.046 41.25,41.046 39.624,42.672
  Bottom Layer w0.254: R59.1@34.544,48.432 35.261,48.432 ; R59.1@34.836,48.224 cw(c35.261,47.893) 35.261,48.432 ; R59.1@34.836,48.64 ccw(c35.261,48.971) 35.261,48.432 ; v1@39.235,43.061 ccw(c38.91,43.386) 39.37,43.386 ccw(c39.83,43.386) v1@39.505,43.061 ; v1(39.37,42.926) 39.37,44.323 35.261,48.432
OT8: R62.1 U8.28 | length 15
  Top Layer w0.254: v1@37.846,42.735 cw(c37.846,42.276) 38.171,42.601 cw(c38.496,42.926) v1@38.036,42.926 ; v1(37.846,42.926) 40.386,40.386 41.402,40.386 42.838,38.95 U8.28@42.838,37.458
  Bottom Layer w0.254: R62.1@34.544,44.958 35.814,44.958 v1(37.846,42.926) ; R62.1@34.808,44.719 cw(c35.385,44.142) 35.385,44.958 cw(c35.385,45.774) R62.1@34.808,45.197 ; v1@37.656,42.926 ccw(c37.196,42.926) 37.521,43.251 ccw(c37.846,43.576) v1@37.846,43.116
PWR_4G: R27.2 U8.9 | length 31.9
  Top Layer w0.254: U8.9@50.038,32.258 51.359,32.258 51.859,32.758 53.578,32.758 54.102,33.282 54.102,41.935 v1(50.063,45.974) ; v1@50.063,45.783 cw(c50.063,45.324) 50.389,45.649 cw(c50.714,45.974) v1@50.254,45.974
  Top Layer w0.508: R27.2@43.818,54.783 cw(c43.458,54.423) 43.967,54.423 cw(c44.477,54.423) R27.2@44.117,54.783 ; R27.2@43.967,54.932 43.967,52.299 v1(48.26,48.006)
  Bottom Layer w0.508: v1(48.26,48.006) 50.063,46.203 v1(50.063,45.974)
RE_485: U3.2 U3.3 U8.2 | length 33.4
  Top Layer w0.254: v1(42.926,33.028) 43.465,33.028 47.735,28.758 U8.2@50.038,28.758 ; v1@43.061,32.893 cw(c43.386,32.568) 43.386,33.028 cw(c43.386,33.488) v1@43.061,33.163
  Top Layer w0.508: U3.2@23.611,31.115 25.451,31.115 26.721,32.385 ; U3.3@23.611,32.385 26.721,32.385 ; v1(35.306,33.02) 27.356,33.02 26.721,32.385
  Bottom Layer w0.254: v1@35.441,32.885 cw(c35.766,32.56) 35.766,33.02 cw(c35.766,33.48) v1@35.441,33.155 ; v1@35.47,33.02 42.918,33.02 v1(42.926,33.028)
RESET_4G: R4.1 U8.27 | length 52.9
  Top Layer w0.254: U8.27@43.338,37.458 43.338,36.108 43.838,35.608 43.838,33.867 v1(47.752,29.953) ; v1@47.562,29.953 ccw(c47.102,29.953) 47.427,30.278 ccw(c47.752,30.603) v1@47.752,30.143
  Top Layer w0.508: v1(50.038,26.924) 52.4,26.924 54.002,25.322 67.994,25.322 v1(69.315,26.643) ; v1(74.219,29.374) 75.528,29.374 76.2,28.702 79.375,28.702 v1@80.645,29.972
  Bottom Layer w0.254: v1@47.752,29.762 cw(c47.752,29.303) 48.077,29.628 cw(c48.402,29.953) v1@47.942,29.953 ; v1(47.752,29.953) 50.038,27.667 v1(50.038,26.924) ; v1@49.903,27.059 ccw(c49.578,27.384) 50.038,27.384 ccw(c50.498,27.384) v1@50.173,27.059
  Bottom Layer w0.508: v1(69.315,26.643) 69.315,26.719 71.97,29.374 v1(74.219,29.374) ; v1(80.63,29.972) 81.507,30.849 R4.1@83.05,30.849 ; R4.1@82.901,30.7 ccw(c82.541,30.339) 82.541,30.849 ccw(c82.541,31.358) R4.1@82.901,30.998
RS_N: J6.2 R18.1 R19.2 U3.7 | length 22.7
  Top Layer w0.508: J6.2@5.055,34.186 9.502,34.186 12.839,30.849 R19.2@15.748,30.849 ; J6.2@5.582,33.658 cw(c6.856,32.385) 6.856,34.186 cw(c6.856,35.987) J6.2@5.582,34.714 ; R19.2@15.574,30.7 ccw(c15.214,30.339) 15.214,30.849 ccw(c15.214,31.358) R19.2@15.574,30.998 ; R19.2@15.599,30.7 cw(c15.219,30.32) 15.756,30.32 ; R18.1@15.607,29.13 ccw(c15.247,29.49) 15.756,29.49 ccw(c16.265,29.49) R18.1@15.905,29.13 ; R18.1@15.756,28.956 15.756,30.841 R19.2@15.748,30.849 ; 15.756,30.359 cw(c16.238,30.359) R19.2@15.897,30.7 ; R19.2@15.922,30.7 cw(c16.925,29.697) 16.925,31.115 ; U3.7@18.023,31.115 16.014,31.115 R19.2@15.748,30.849
RS_P: J6.1 R19.1 R20.2 U3.6 | length 19.8
  Top Layer w0.635: J6.1@5.055,38.146 7.542,38.146 13.299,32.389 R19.1@15.748,32.389 ; J6.1@5.537,37.663 cw(c6.702,36.498) 6.702,38.146 cw(c6.702,39.794) J6.1@5.537,38.629 ; R20.2@15.756,34.29 15.756,32.397 R19.1@15.748,32.389 ; U3.6@18.023,32.385 15.752,32.385 R19.1@15.748,32.389
RXD_4G: J1.23 J3.1 U8.16 | length 73.9
  Top Layer w0.254: U8.16@50.038,35.758 50.038,36.696 51.442,38.1 v1(51.74,38.1) ; 50.906,37.564 cw(c51.74,36.731) v1@51.74,37.91 ; 51.34,37.998 cw(c51.74,37.598) v1@51.74,38.163
  Top Layer w0.508: v1(63.5,38.092) 63.5,39.853 64.008,40.361 70.206,40.361 72.822,37.744 72.822,22.936 74.676,21.082 ; J3.1@77.724,14.478 77.724,18.034 74.676,21.082 ; J1.23@90.2,26.202 90.2,22.23 89.052,21.082 74.676,21.082
  Bottom Layer w0.508: v1@51.816,38.1 51.824,38.092 v1(63.5,38.092)
SIM_CLK: C3.1 J1.12 R7.2 | length 11.4
  Top Layer w0.508: J1.12@82.6,35.302 82.6,39.166 v1(84.836,41.402)
  Bottom Layer w0.508: C3.1@83.566,41.394 83.574,41.402 v1(84.836,41.402) 84.844,41.394 R7.2@86.36,41.394 ; C3.1@83.74,41.245 cw(c84.12,40.865) 84.12,41.402 ; C3.1@83.74,41.543 ccw(c84.081,41.884) 84.081,41.402 ; R7.2@86.186,41.245 ccw(c85.826,40.885) 85.826,41.394 ccw(c85.826,41.903) R7.2@86.186,41.543
SIM_DATA: C2.1 J1.10 R3.2 | length 39
  Top Layer w0.457: J1.10@81.8,35.302 81.8,40.855 83.744,42.799 100.686,42.799 106.655,48.768 C2.1@107.442,48.768 ; C2.1@107.25,48.601 ccw(c106.846,48.197) 106.846,48.768 ccw(c106.846,49.339) C2.1@107.25,48.935
  Top Layer w0.508: C2.1@107.293,48.917 ccw(c106.933,49.277) 107.442,49.277 ccw(c107.951,49.277) C2.1@107.591,48.917 ; R3.2@107.293,50.643 cw(c106.933,50.283) 107.442,50.283 cw(c107.951,50.283) R3.2@107.591,50.643 ; C2.1@107.442,48.768 R3.2@107.442,50.792
SIM_RST: C4.1 J1.14 R6.2 | length 13.5
  Top Layer w0.508: J1.14@83.4,35.302 83.4,37.426 86.36,40.386 v1(88.392,40.386)
  Bottom Layer w0.508: R6.2@88.243,41.245 cw(c87.883,40.885) 88.392,40.885 cw(c88.901,40.885) R6.2@88.541,41.245 ; v1(88.392,40.386) R6.2@88.392,41.394 C4.1@90.17,41.394 ; R6.2@88.566,41.245 cw(c88.926,40.885) 88.926,41.394 cw(c88.926,41.903) R6.2@88.566,41.543 ; C4.1@89.996,41.245 ccw(c89.636,40.885) 89.636,41.394 ccw(c89.636,41.903) C4.1@89.996,41.543
SIM_VDD: C1.1 J1.8 R2.1 U1.1 U2.6 | length 76.3
  Top Layer w0.457: J1.8@81,35.302 v1(81,41.605) 83.184,43.79 99.974,43.79 105.639,49.454 105.639,54.889 106.637,55.888 R2.1@107.442,55.888 ; R2.1@107.25,55.721 ccw(c106.846,55.317) 106.846,55.888 ccw(c106.846,56.459) R2.1@107.25,56.055
  Bottom Layer w0.381: U2.6@79.36,66.154 79.36,64.15 83.174,60.336 U1.1@83.174,59.754
  Bottom Layer w0.457: C1.1@79.645,59.797 cw(c79.241,59.393) 79.812,59.393 cw(c80.383,59.393) C1.1@79.979,59.797 ; C1.1@80.004,60.131 ccw(c80.914,61.041) 80.914,59.754 ; v1(81,41.605) 79.812,42.793 C1.1@79.812,59.964 80.022,59.754 U1.1@83.174,59.754 ; U1.1@81.511,59.491 ccw(c80.877,58.857) 80.877,59.754 ccw(c80.877,60.651) U1.1@81.511,60.017
SWCLK: J5.3 U8.49 | length 14.9
  Top Layer w0.254: J5.3@33.274,20.32 35.56,20.32 40.838,25.598 U8.49@40.838,26.558 ; J5.3@33.57,20.024 cw(c34.286,19.308) 34.286,20.32 cw(c34.286,21.332) J5.3@33.57,20.616 ; J5.3@33.75,19.844 cw(c34.899,18.695) 34.899,20.32 cw(c34.899,21.945) J5.3@33.75,20.796
SWDIO: J5.1 U8.46 | length 12.1
  Top Layer w0.254: J5.1@33.274,25.4 33.528,25.4 37.386,29.258 U8.46@39.138,29.258 ; J5.1@33.274,25.565 ccw(c33.274,26.577) J5.1@33.989,25.861 ; J5.1@33.274,25.819 ccw(c33.274,27.444) 34.423,26.295 ; J5.1@33.274,26.073 ccw(c33.274,28.311) 34.856,26.728 ; J5.1@33.947,25.4 cw(c34.959,25.4) 34.243,26.115
TXD_4G: J1.31 J3.2 U8.17 | length 86.3
  Top Layer w0.254: U8.17@48.338,37.458 49.233,38.353 49.233,39.599 ; 49.233,38.314 cw(c51.123,38.314) 49.822,39.684 ; 49.233,38.905 cw(c50.561,38.905) 49.647,39.868 ; 49.233,39.497 cw(c49.999,39.497) 49.472,40.052
  Top Layer w0.457: v1(64.516,39.37) 69.088,39.37 71.882,36.576 71.882,20.574 v1(73.152,19.304) ; v1(87.02,18.237) 88.841,18.237 89.662,19.058
  Top Layer w0.508: 49.589,39.954 51.156,39.954 v1(51.74,39.37) ; 49.738,39.805 cw(c50.098,39.445) 50.098,39.954 cw(c50.098,40.464) 49.738,40.103 ; J3.2@80.264,15.24 82.323,17.299 87.903,17.299 88.841,18.237 ; J3.2@80.81,14.478 cw(c83.968,14.478) 81.735,16.711 ; 89.662,19.058 93.4,22.796 J1.31@93.4,26.202
  Bottom Layer w0.457: v1(51.74,39.37) v1(64.516,39.37) ; v1(73.152,19.304) 74.219,18.237 v1(87.02,18.237)
U1_RX: J7.1 U8.43 | length 26.8
  Top Layer w0.254: J7.1@22.352,37.084 22.606,36.83 35.496,36.83 36.322,36.005 36.322,31.996 37.56,30.758 U8.43@39.138,30.758 ; J7.1@22.469,37.201 ccw(c23.364,38.096) 23.364,36.83 ccw(c23.364,36.072) J7.1@22.828,36.608 ; J7.1@22.648,37.38 ccw(c23.977,38.709) 23.977,36.83 ; J7.1@22.828,37.56 ccw(c24.59,39.322) 24.59,36.83
U1_TX: J7.2 U8.42 | length 29.7
  Top Layer w0.254: J7.2@19.812,37.084 21.336,38.608 24.216,38.608 25.366,37.458 35.948,37.458 37.132,36.274 37.132,31.874 37.748,31.258 U8.42@39.138,31.258 ; J7.2@19.812,37.503 ccw(c19.812,38.515) 20.527,37.799 ccw(c21.243,37.084) J7.2@20.231,37.084 ; J7.2@19.812,37.757 ccw(c19.812,39.382) 20.961,38.233 ccw(c22.11,37.084) J7.2@20.485,37.084
U3_RX: U3.1 U8.30 | length 32.1
  Top Layer w0.254: v1@41.703,35.449 ccw(c41.378,35.774) 41.838,35.774 ccw(c42.298,35.774) v1@41.973,35.449 ; v1(41.838,35.314) U8.30@41.838,37.458
  Top Layer w0.508: 22.095,30.229 ccw(c22.9,31.035) U3.1@22.9,29.896 ; U3.1@23.611,29.845 22.479,29.845 21.844,30.48 21.844,34.948 22.21,35.314 34.806,35.314 v1(35.306,35.814)
  Bottom Layer w0.254: v1(35.306,35.814) 36.33,35.814 36.83,35.314 v1@41.656,35.314 ; v1@35.441,35.679 cw(c35.766,35.354) 35.766,35.814 cw(c35.766,36.274) v1@35.441,35.949 ; v1@41.703,35.179 ccw(c41.378,34.854) 41.378,35.314 ccw(c41.378,35.774) v1@41.703,35.449
U3_TX: U3.4 U8.29 | length 24.8
  Top Layer w0.254: U8.29@42.338,37.458 42.338,36.148 42.926,35.56 v1(42.926,34.544) ; v1@42.791,34.679 ccw(c42.466,35.004) 42.926,35.004 ccw(c43.386,35.004) v1@43.061,34.679
  Top Layer w0.508: U3.4@23.611,33.655 24.535,33.655 25.17,34.29 v1(35.261,34.29) ; U3.4@24.322,33.706 ccw(c24.322,34.342) 24.772,33.892
  Bottom Layer w0.254: v1(35.261,34.29) 42.672,34.29 v1(42.926,34.544) ; v1@35.396,34.155 cw(c35.721,33.83) 35.721,34.29 cw(c35.721,34.75) v1@35.396,34.425
U_LED: LED3.2 U8.15 | length 59.9
  Top Layer w0.254: U8.15@50.038,35.258 51.352,35.258 51.654,35.56 51.654,36.625 v1(51.859,36.83) ; 51.654,35.875 cw(c52.814,35.875) v1@51.994,36.695 ; 51.654,36.488 cw(c52.201,36.488) v1@51.814,36.875
  Top Layer w0.508: LED3.2@67.467,71.023 ccw(c66.621,70.177) 66.621,71.374 ccw(c66.621,72.571) LED3.2@67.467,71.725 ; LED3.2@67.818,71.374 66.548,71.374 64.008,68.834 64.008,49.964 69.342,44.63 v1(69.342,43.688)
  Bottom Layer w0.508: v1(51.859,36.83) 52.113,37.084 64.516,37.084 69.342,41.91 v1(69.342,43.688)
USB_N: J1.36 R11.2 R16.2 | length 35.1
  Top Layer w0.508: J1.36@95.4,35.302 95.4,33.756 95.438,33.718 95.438,33.44 96.49,32.389 104.202,32.389 107.188,29.402 107.188,18.113 104.891,15.816 R11.2@103.986,15.816 103.978,15.824 R16.2@102.081,15.824 ; R16.2@102.23,15.675 cw(c102.59,15.315) 102.59,15.824 cw(c102.59,16.333) R16.2@102.23,15.973 ; 103.432,15.824 cw(c103.432,15.287) R11.2@103.812,15.667 ; 103.471,15.824 ccw(c103.471,16.306) R11.2@103.812,15.965 ; R11.2@104.16,15.667 cw(c104.52,15.307) 104.52,15.816 cw(c104.52,16.325) R11.2@104.16,15.965
USB_P: J1.38 R12.2 R14.2 | length 36.9
  Top Layer w0.508: J1.38@96.2,35.302 96.2,33.756 96.805,33.151 104.517,33.151 107.95,29.718 107.95,17.637 R12.2@103.986,13.673 102.208,13.673 R14.2@102.089,13.792 ; R14.2@102.238,13.916 ccw(c102.825,14.503) 102.825,13.673 ; R12.2@103.812,13.524 ccw(c103.452,13.164) 103.452,13.673 ccw(c103.452,14.182) R12.2@103.812,13.822 ; R12.2@104.011,13.884 ccw(c104.011,14.333) R12.2@104.329,14.016 ; R12.2@104.222,13.673 cw(c104.792,13.673) R12.2@104.389,14.076
V4G: C8.1 C9.1 C10.1 C11.1 C12.1 C24.1 C25.1 C26.1 C27.1 D6.2 J1.2 J1.24 J1.39 J1.41 J1.52 J3.3 R1.2 R17.1 R24.2 R25.2 U6.4 | length 192.7
  Top Layer w0.508: C27.1@59.817,54.618 61.214,56.015 61.214,65.024 v1(62.484,66.294) ; C27.1@59.842,54.829 ccw(c59.842,55.278) C27.1@60.16,54.961 ; C27.1@60.053,54.618 cw(c60.623,54.618) C27.1@60.22,55.021 ; v1@77.5,36.005 cw(c77.5,35.045) 78.179,35.723 ; v1(77.5,36.068) 77.834,36.068 J1.2@78.6,35.302 78.6,32.766 ; 90.6,37.137 cw(c91.887,37.137) v1@90.977,38.047 ; 90.6,37.622 cw(c91.013,37.622) v1@90.943,38.029 ; 90.678,30.734 90.6,30.812 J1.24@90.6,35.302 90.6,37.76 v1(90.932,38.092) ; v1(97.028,28.956) 98.806,28.956 100.33,30.48 v1(100.33,31.242) ; J1.52@101.797,35.299 ccw(c102.394,35.896) v1@102.394,35.052 ; v1@102.596,35.112 cw(c102.352,35.854) J1.52@101.8,35.302 102.05,35.052 v1(102.616,35.052)
  Top Layer w0.762: C24.1@53.912,53.322 cw(c52.329,51.74) v1@54.567,51.74 ; C24.1@54.166,54.579 ccw(c51.457,57.288) R24.2@55.288,57.288 ; U6.4@54.49,61.367 54.49,58.667 55.288,57.869 R24.2@55.288,57.506 55.288,54.698 55.368,54.618 C27.1@59.817,54.618 ; C24.1@54.54,53.951 54.567,53.924 C25.1@54.567,50.47 ; U6.4@54.559,59.417 ccw(c56.536,59.417) 55.138,58.019 ; v1@54.567,51.869 cw(c56.622,51.869) C24.1@55.169,53.322 ; C24.1@54.705,54.041 ccw(c53.297,55.449) 55.288,55.449 ; C24.1@54.884,53.861 cw(c56.712,52.033) 56.712,54.618 ; 54.905,58.252 cw(c54.184,57.531) R24.2@55.204,57.531 ; C24.1@55.423,53.322 cw(c58.552,50.194) 58.552,54.618 ; v2(68.58,37.846) 68.58,37.641 70.612,35.609 70.612,17.94 76.36,12.192 81.254,12.192 82.804,13.742 J3.3@82.804,14.478 ; v2@68.707,37.846 ccw(c69.509,37.846) 68.942,37.279 ; 81.568,12.506 ccw(c79.597,14.478) J3.3@82.385,14.478
  Top Layer w1.016: C27.1@59.814,54.65 cw(c60.28,54.118) 60.78,54.618 ; C27.1@59.817,54.618 60.78,54.618 ; C27.1@59.842,54.661 cw(c59.842,52.5) 61.37,54.028 ; v1(97.028,28.956) 95.25,30.734 90.678,30.734 82.677,30.734 80.645,32.766 78.6,32.766 76.2,32.766 74.85,34.116 74.85,38.18 v2(71.882,41.148) 71.112,41.918 67.556,41.918 61.976,47.498 61.976,53.422 60.78,54.618
  Bottom Layer w0.508: v1(62.484,66.294) 62.611,66.421 R17.1@64.262,66.421 ; v1@62.529,66.249 cw(c62.944,65.834) 62.944,66.421 ; R17.1@64.113,66.272 ccw(c63.753,65.912) 63.753,66.421 ccw(c63.753,66.93) R17.1@64.113,66.57 ; v1(77.5,36.068) 77.5,35.014 C8.1@77.716,34.798 ; R1.2@90.851,36.402 cw(c90.491,36.042) 91,36.042 cw(c91.509,36.042) R1.2@91.149,36.402 ; R1.2@90.851,36.75 ccw(c90.491,37.11) 91,37.11 ccw(c91.509,37.11) R1.2@91.149,36.75 ; v1@90.887,38.047 cw(c90.615,37.775) 91,37.775 ; v1(90.932,38.092) 91,38.024 R1.2@91,36.576 91,34.722 C9.1@91.178,34.544 ; C11.1@96.274,25.654 96.743,26.123 C10.1@96.743,27.536 96.743,28.671 v1(97.028,28.956) ; C11.1@96.274,25.89 ccw(c96.274,26.46) C11.1@96.677,26.057 ; C11.1@96.485,25.679 cw(c96.934,25.679) C11.1@96.617,25.997 ; C10.1@96.594,27.362 cw(c96.234,27.002) 96.743,27.002 cw(c97.253,27.002) C10.1@96.892,27.362 ; C10.1@96.594,27.71 ccw(c96.234,28.07) 96.743,28.07 ccw(c97.253,28.07) C10.1@96.892,27.71 ; v1(100.33,31.242) 100.33,31.75 101.608,33.028 C12.1@101.608,35.052 v1(102.616,35.052) ; C12.1@101.459,34.878 cw(c101.099,34.518) 101.608,34.518 cw(c102.117,34.518) C12.1@101.757,34.878 ; C12.1@101.757,34.903 cw(c102.117,34.543) 102.117,35.052 cw(c102.117,35.561) C12.1@101.757,35.201
  Bottom Layer w0.762: R25.2@54.481,50.395 54.481,53.739 D6.2@54.693,53.951 ; v2(68.58,37.846) v2(71.882,41.148)
  other v1: 54.54,51.918
VBAT: Bat1.1 C32.1 R34.2 U8.1 | length 45.3
  Top Layer w0.254: U8.1@50.038,28.258 52.47,28.258 53.296,27.432
  Top Layer w0.508: 53.296,27.432 54.312,26.416 59.639,26.416 65.303,32.08 65.303,33.552 Bat1.1@65.081,33.774 ; 61.986,28.763 cw(c65.532,25.217) Bat1.1@65.532,30.232 ; 62.853,29.63 cw(c65.532,26.951) Bat1.1@65.532,30.74 ; R34.2@63.122,33.591 cw(c63.366,33.169) 63.492,33.64 ; R34.2@63.166,33.625 cw(c63.526,33.265) 63.526,33.774 cw(c63.526,34.283) R34.2@63.166,33.923 ; R34.2@63.2,33.879 ccw(c63.66,34.145) 63.522,33.632 ; 63.712,33.774 cw(c63.712,32.33) Bat1.1@65.072,32.814 ; 63.72,30.497 cw(c65.532,28.686) Bat1.1@65.532,31.248 ; Bat1.1@64.432,33.774 cw(c64.432,32.586) Bat1.1@65.551,32.984 ; Bat1.1@64.594,32.644 ccw(c62.992,32.074) R34.2@62.992,33.774 Bat1.1@65.081,33.774 ; Bat1.1@66.01,32.878 cw(c67.111,32.65) 67.111,33.774 ; Bat1.1@66.507,32.775 cw(c67.735,32.52) C32.1@67.735,33.774 ; C32.1@67.783,33.625 ccw(c67.423,33.265) 67.423,33.774 ccw(c67.423,34.283) C32.1@67.783,33.923 ; C32.1@68.064,33.659 67.957,33.552 C32.1@67.735,33.774 ; Bat1.1@65.081,33.774 C32.1@67.735,33.774
VCC: J2.1 R63.1 | length 5.9
  Top Layer w0.508: R63.1@94.996,11.797 96.407,11.797 97.968,10.236 J2.1@97.968,9.899 ; R63.1@95.145,11.648 cw(c95.505,11.288) 95.505,11.797 cw(c95.505,12.306) R63.1@95.145,11.946 ; 97.014,11.19 ccw(c97.968,12.145) J2.1@97.968,10.795 ; J2.1@97.881,10.323 ccw(c97.968,10.41) J2.1@97.968,10.287
VEXT: J1.11
WK_IND: R37.2 R38.1 U8.51 | length 45.1
  Top Layer w0.254: R37.2@13.379,8.876 14.917,10.414 33.274,10.414 41.838,18.978 U8.51@41.838,26.558 ; R37.2@13.379,9.239 ccw(c13.379,10.115) 13.999,9.496 ; R37.2@13.717,8.901 cw(c14.473,8.901) 13.938,9.435
  Top Layer w0.508: R38.1@13.23,7.032 ccw(c12.87,7.392) 13.379,7.392 ccw(c13.889,7.392) R38.1@13.528,7.032 ; R37.2@13.23,8.702 cw(c12.87,8.342) 13.379,8.342 cw(c13.889,8.342) R37.2@13.528,8.702 ; R38.1@13.379,6.858 R37.2@13.379,8.876
XH1: C30.1 U8.5 X2.1 | length 12.6
  Top Layer w0.254: U8.5@50.038,30.258 53.296,30.258 X2.1@56.388,33.35
  Top Layer w0.508: X2.1@56.388,33.35 57.353,33.35 C30.1@59.563,35.56 ; 59.041,35.038 cw(c59.792,34.287) C30.1@59.792,35.349
XH2: C31.1 U8.6 X2.2 | length 27.3
  Top Layer w0.254: U8.6@50.038,30.758 52.594,30.758 54.864,33.028 54.864,37.592 56.388,39.116 X2.2@56.388,42.85 ; X2.2@55.798,40.456 cw(c54.57,39.116) 56.388,39.116 cw(c58.206,39.116) X2.2@56.978,40.456 ; X2.2@55.97,40.644 cw(c55.099,39.693) 56.388,39.693 cw(c57.677,39.693) X2.2@56.806,40.644
  Top Layer w0.508: X2.2@56.388,42.85 57.48,42.85 ; X2.2@57.083,42.579 cw(c57.48,42.424) 57.48,42.85 ; X2.2@57.083,43.121 ccw(c57.48,43.276) 57.48,42.85 ; 59.041,41.289 ccw(c59.792,42.04) C31.1@59.792,40.978 ; C31.1@59.563,40.767 57.48,42.85
XL1: C28.1 U8.3 X1.1 | length 11.3
  Top Layer w0.254: U8.3@50.038,29.258 52.784,29.258 54.026,28.016 X1.1@56.134,28.016 ; X1.1@55.738,27.747 ccw(c55.087,27.096) 55.087,28.016 ccw(c55.087,28.936) X1.1@55.738,28.286
  Bottom Layer w0.508: X1.1@55.954,27.837 cw(c55.395,27.277) 56.186,27.277 ; C28.1@56.037,26.412 ccw(c55.677,26.773) 56.186,26.773 ccw(c56.695,26.773) C28.1@56.335,26.412 ; X1.1@56.134,28.016 56.186,27.964 C28.1@56.186,26.238
XL2: C29.1 U8.4 X1.2 | length 11.1
  Top Layer w0.254: U8.4@50.038,29.758 54.037,29.758 54.356,29.439 X1.2@56.134,29.439 ; X1.2@55.738,29.169 ccw(c55.087,28.519) 55.087,29.439 ccw(c55.087,30.358) X1.2@55.738,29.708
  Bottom Layer w0.508: X1.2@55.954,29.618 ccw(c55.395,30.178) 56.186,30.178 ; C29.1@56.037,31.22 cw(c55.677,30.86) 56.186,30.86 cw(c56.695,30.86) C29.1@56.335,31.22 ; X1.2@56.134,29.439 56.186,29.491 C29.1@56.186,31.394
pads on no net: Bat1.0 J1.0 J1.1 J1.3 J1.5 J1.6 J1.7 J1.13 J1.16 J1.17 J1.19 J1.20 J1.25 J1.28 J1.30 J1.33 J1.44 J1.45 J1.46 J1.47 J1.48 J1.49 J1.51 J2.4 J2.6 J2.7 J2.8 J2.9 J2.MH1 J2.MH2 U1.7 U2.1 U4.5 U8.8 U8.10 U8.11 U8.14 U8.33 U8.34 U8.35 U8.36 U8.37 U8.38 U8.39 U8.40 U8.41 U8.52 U8.53 U8.54 U8.55 U8.56 U8.57 U8.58 U8.59 U8.61 U8.62 X1.

## Polygon pours and split planes (outlines as drawn)
GND on Bottom Layer "GND" (solid, remove dead copper, pour order 2): 5,65 5,60.138 ccw(c6.464,60.138) 6.464,58.674 40.378,58.674 cw(c40.378,56.134) 42.918,56.134 42.918,42.926 cw(c41.992,42.926) 41.992,42 40,42 5.54,42 ccw(c5.54,39.46) 3,39.46 3,39 3,9 ccw(c4,9) 4,8 7,8 cw(c7,6) 9,6 ccw(c10,6) 10,5 104,5 ccw(c104,7) 106,7 106,9 106,14.46 cw(c108.54,14.46) 108.54,17 109,17 109.46,17 ccw(c109.46,19.54) 112,19.54 112,71.374 112,73.076 ccw(c109.46,73.076) 109.46,75.616 107,75.616 cw(c107,76.542) 106.074,76.542 106.074,79.252 106.074,79.46 ccw(c103.534,79.46) 103.534,82 103,82 11.54,82 ccw(c11.54,79.46) 9,79.46 9,77 9,76 cw(c8,76) 8,75 7.54,75 ccw(c7.54,72.46) 5,72.46 5,64.719

## Other copper
Top Layer:
  region net V4G: 96.436,25.592 97.565,25.592 97.565,29.204 97.367,29.402 96.633,29.402 96.436,29.204
  region net 5.0V: 29.261,63.195 29.261,65.176 ccw(c29.185,65.176) 29.185,65.253 27.838,65.253 ccw(c27.838,64.897) 27.483,64.897 27.483,63.246 ccw(c27.534,63.246) 27.534,63.195
Bottom Layer:
  region net 5.0V: 47.523,57.023 47.904,56.642 51.918,56.642 52.146,56.871 52.146,58.395 50.368,60.173 50.368,61.595 49.733,62.23 48.369,62.23 47.523,61.384
  region net GND: 31.585,74.781 35.496,74.781 cw(c35.496,74.4) 35.877,74.4 35.877,73.815 cw(c35.395,73.815) 35.395,73.333 31.864,73.333 cw(c31.864,73.638) 31.559,73.638 31.559,74.781 cw(c31.585,74.781) 31.585,74.806

## Silkscreen, mask and mechanical layers (free items; w line width, h text height)
Top Overlay:
  lines w0.127: 11.049,41.781 13.081,41.781 11.997,42.865 11.049,41.781
  text "电源指示" at 38.608,76.962 h2.03
  text "正极" at 2.032,74.93 h2.54
  text "9~12V DC" at 2.032,74.93 h2.03 r90
  text "+" at 17.089,71 h2.03
  text "用户LED" at 64.008,67.92 h2.54
  text "-" at 12.039,67.5 h2.03
  text "负极" at 4.318,63.03 h2.54
  text "网络状态" at 64.262,59.792 h2.54
  text "唤醒状态" at 64.262,51.054 h2.54
  text "5.0V" at 15.386,39.262 h1.52
  text "U1T" at 18.796,39.262 h1.52
  text "U1R" at 22.087,39.262 h1.52
  text "GND" at 11.938,39.116 h1.52
  text "485_A" at 7.874,37.084 h1.52
  text "485_B" at 7.62,33.782 h1.52
  text "CAH_L" at 7.366,29.21 h1.52
  text "DIO" at 29.21,25.146 h1.52
  text "CAH_H" at 7.366,24.892 h1.52
  text "GND" at 28.88,22.758 h1.52
  text "BOOT0" at 38.362,22.023 h1.52
  text "GND" at 7.62,21.937 h1.52
  text "CLK" at 28.956,19.812 h1.52
  text "BMS唤醒" at 7.62,18.346 h1.52
  text "3V3" at 28.956,17.526 h1.52
  text "用户唤" at 7.62,14.478 h1.52
  text "湖南则立新能源" at 30.226,13.208 h2.03
  text "醒输入" at 7.62,13.032 h1.52
  text "RST_CPU" at 50.292,12.192 h2.03
  text "2019-9-12" at 38.862,11.67 h1.02
  text "RST_4G" at 70.104,9.398 h2.03
  text "GND" at 7.62,8.382 h1.52
  text "R4G" at 74.219,6.096 h1.52
  text "T4G" at 79.022,6.096 h1.52
  text "V4G" at 82.296,6.096 h1.52
  text "GND" at 85.852,6.096 h1.52
Bottom Overlay:
  text "OUT5" at 4.318,55.745 h1.52
  text "OUT4" at 10.668,55.745 h1.52
  text "OUT6" at 4.318,53.086 h1.52
  text "OUT3" at 10.414,53.086 h1.52
  text "OUT2" at 10.414,51.054 h1.52
  text "OUT7" at 4.318,50.546 h1.52
  text "OUT8" at 4.572,48.26 h1.52
  text "OUT1" at 10.414,48.26 h1.52
  text "12V" at 10.668,45.698 h1.52
  text "GND" at 4.318,45.466 h1.52
Mechanical 1:
  the board outline again, w0.1

## Text inside footprints (layer, text, board x,y; h text height)
J1: Top Overlay "1" at 77.1,26.621 h1.52 r180
U1: Bottom Overlay "JMP" at 96.374,49.154 h0.8